# Altium PCB BSPD.PcbDoc (part 1 of 2)
Units mm, origin at the board's own origin, x right, y up, seen from the top; angles counter-clockwise.
Board outline 50 x 50 mm, 2 copper layers (Top Layer, Bottom Layer), stack 1.57 mm thick; 80 components, 29 nets, 173 pads, 66 vias.
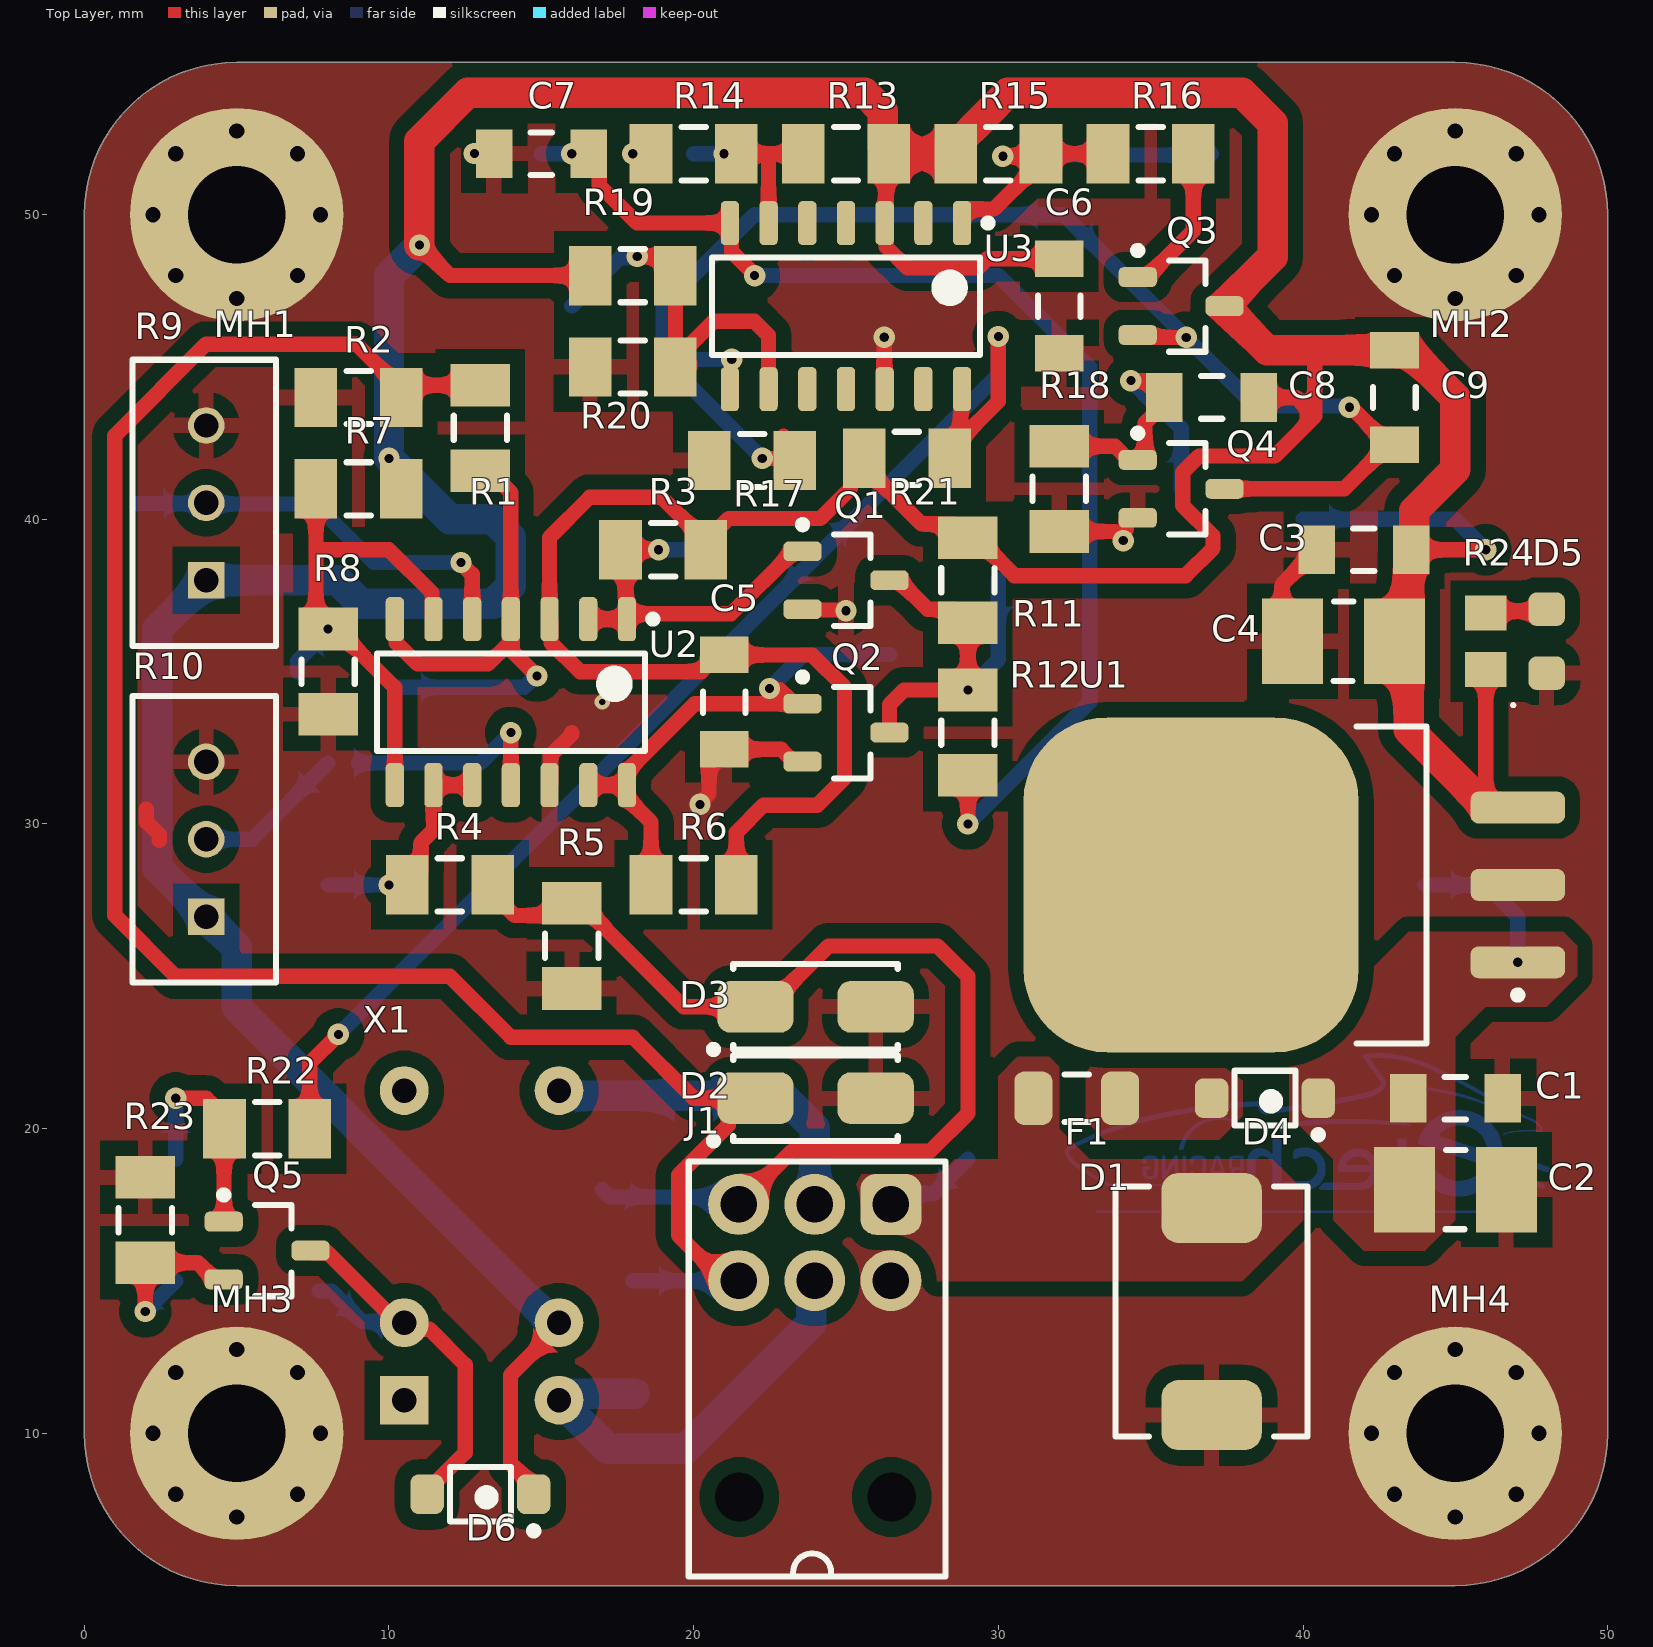
[diagram p0: Top Layer view]
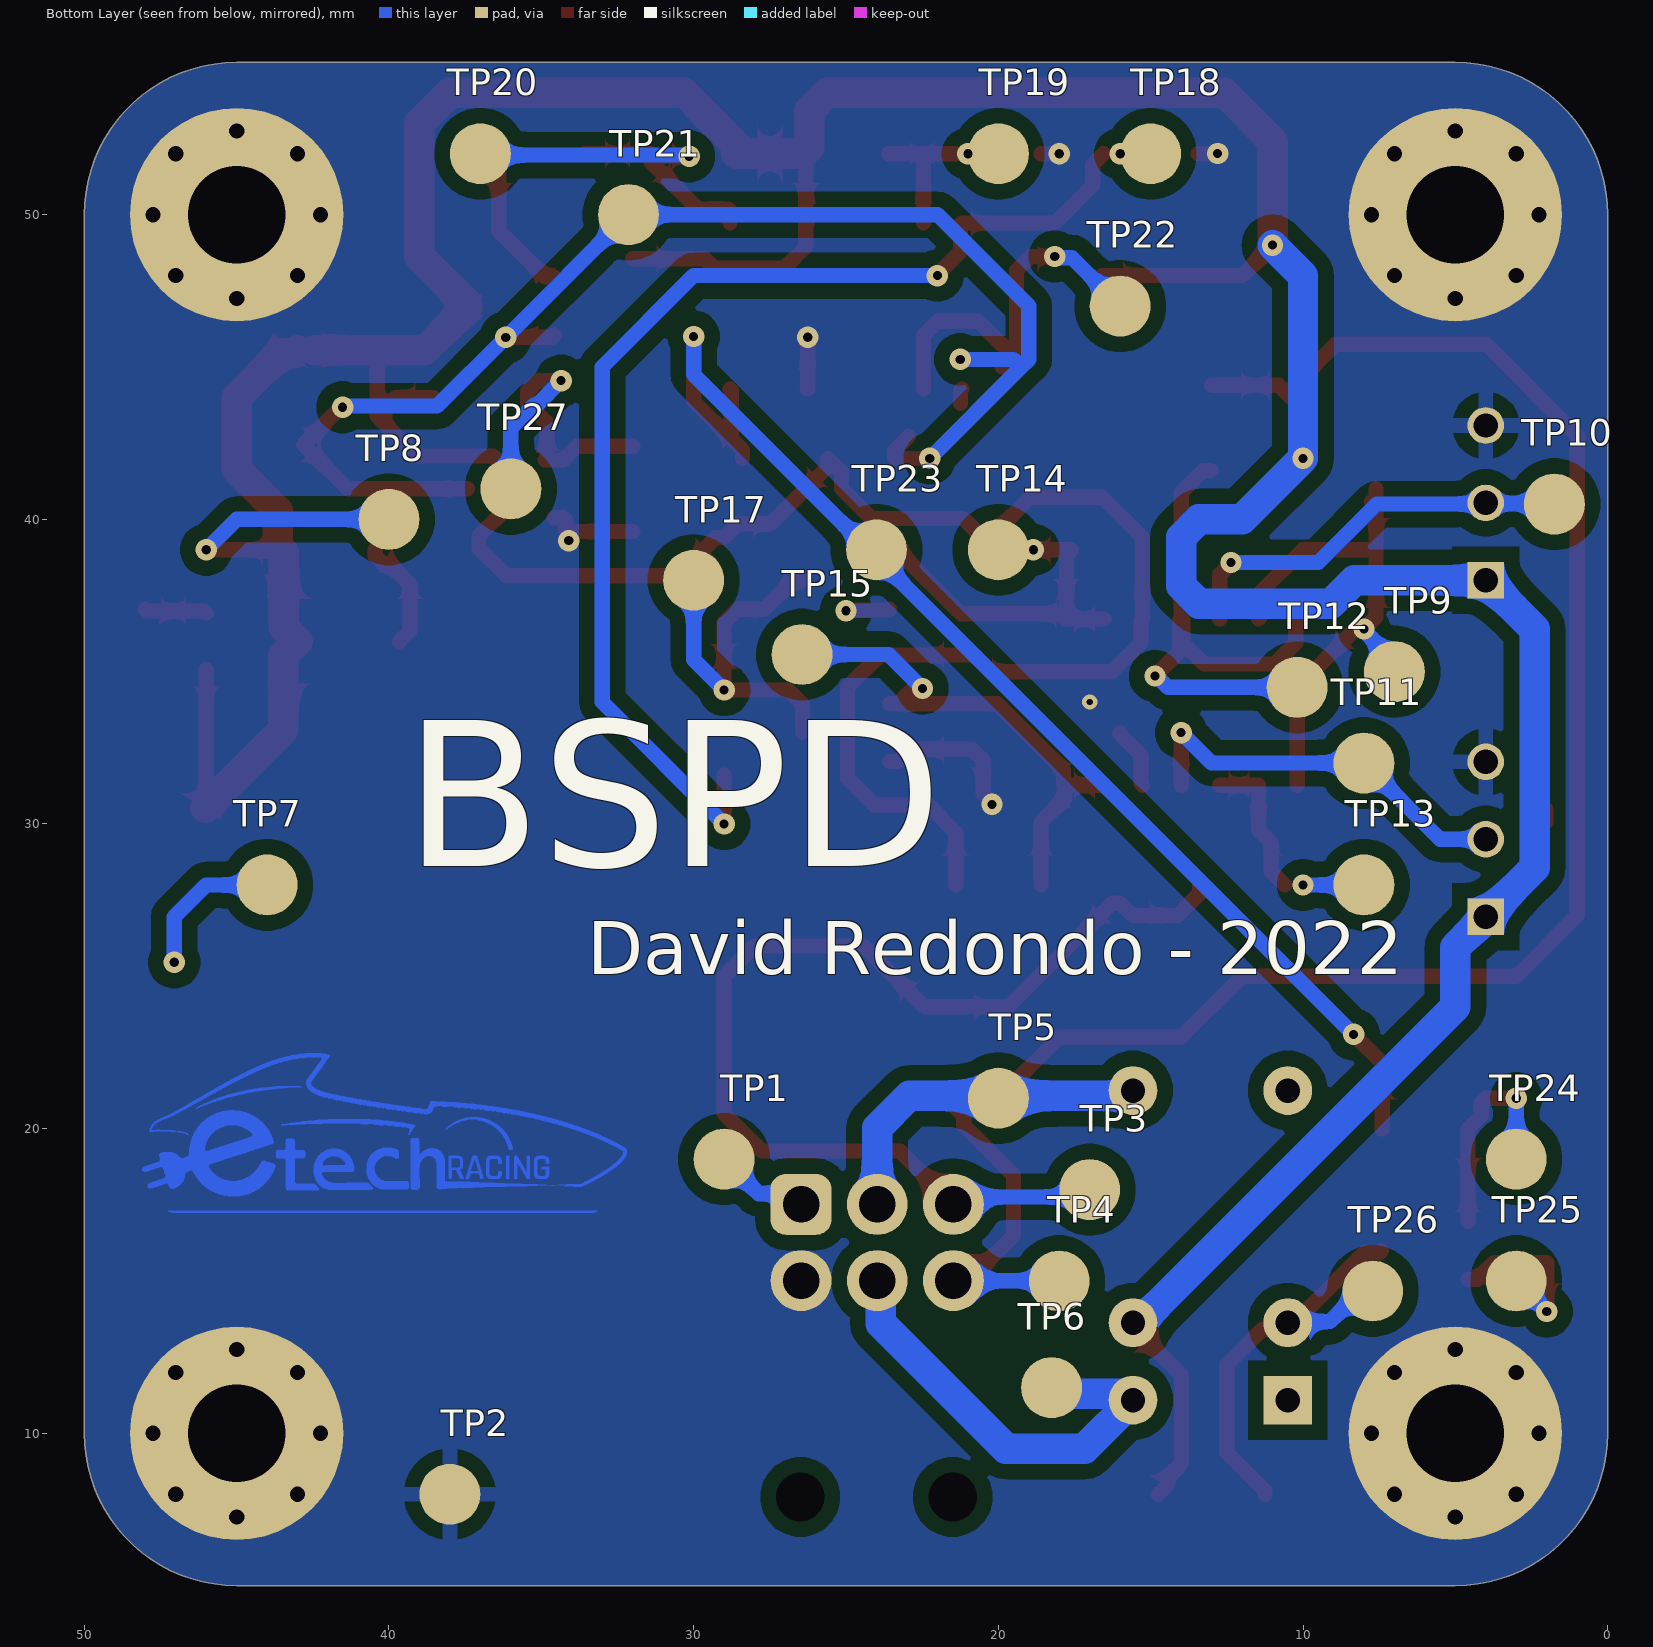
[diagram p1: Bottom Layer view, seen from below]
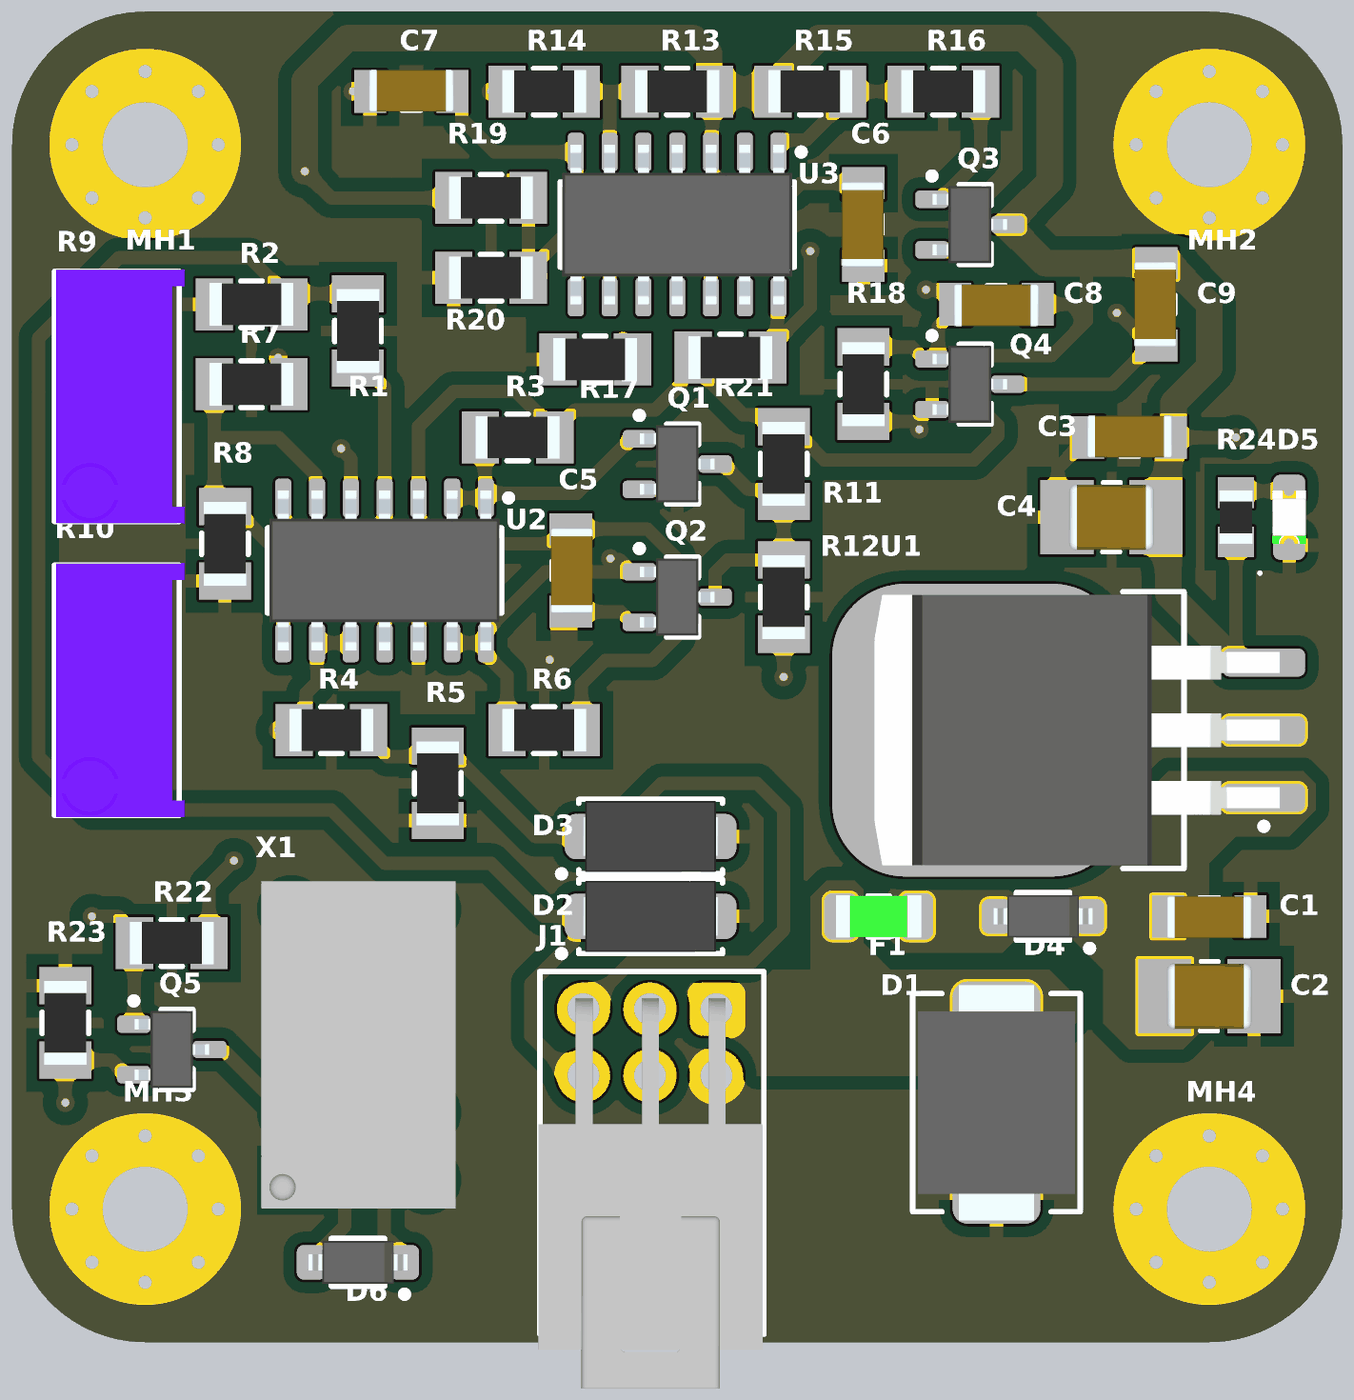
[diagram p2: 3D render of the assembled board from above, using the file's embedded part models]

## Layer stack, top to bottom
Top Solder: solder mask 0.01, Solder Resist, Dk 3.5
Top Layer: signal copper 0.035
Dielectric 1: dielectric 1.5, FR-4, Dk 4.8
Bottom Layer: signal copper 0.035
Bottom Solder: solder mask 0.01, Solder Resist, Dk 3.5

## Board outline
0,10 0,50 cw(c5,50) 5,55 45,55 cw(c45,50) 50,50 50,10 cw(c45,10) 45,5 5,5 cw(c5,10)

## Design rules (kind name [scope] priority, off if disabled: settings)
Clearance [All] p1: gap=0.5 ignorepadtopadclearanceinfootprint=FALSE
HoleSize [All] p1: absolutevalues=TRUE maxlimit=5 minlimit=0.025 maxpercent=80.000 minpercent=20.000
PolygonConnect [All] p1: connectstyle=Relief reliefconductorwidth=0.5 reliefentries=4 polygonreliefangle="90 Angle" airgapwidth=0.5
RoomDefinition BSPD [InComponentClass('BSPD')] p1: confinementstyle=ConfineIn formatcopy=TRUE lockcomponents=FALSE outline 0,66.75 55,66.75 55,0 0,0
RoutingVias [All] p1: holewidth=0.3 width=0.7 viastyle="Through Hole" minholewidth=0.2 minwidth=0.5 maxholewidth=3 maxwidth=5
SilkToSolderMaskClearance [IsPad] p1: minsilkscreentomaskgap=0 clearancetoexposedcopper=TRUE
SolderMaskExpansion [All] p1: expansion=0.102 istentingtop=FALSE
Width [All] p1: maxlimit=5 minlimit=0.2 preferedwidth=0.5
28 further rules are at their usual default settings.

## Components (designator, comment, footprint, x,y, rotation, side; value= is the part's Value field where it differs from the comment)
C1 "885012008055" C1206FNPC-RW 45,21 r180 top
C2 "GRJ32ER71H106KE11L" C10u-50V-1210FNPMLCC-X7R 45,18 r180 top
C3 "885012008055" C1206FNPC-RW 42,39 r0 top
C4 "GRJ32ER71H106KE11L" C10u-50V-1210FNPMLCC-X7R 41.325,36 r0 top
C5 "885012208058" C1206FNPC-RW 21,34 r270 top
C6 "885012208058" C1206FNPC-RW 32,47 r90 top
C7 "885012208018" C1206FNPC-RW 15,52 r0 top
C8 "885012208058" C1206FNPC-RW 37,44 r180 top
C9 "885012208036" C1206FNPC-RW 43,44 r90 top
D1 "824551301" DTVS-DO-214AB 37,14 r90 top
D2 "824501600" DTVS-DO-214AC 24,21 r180 top
D3 "824501600" DTVS-DO-214AC 24,24 r180 top
D4 "MBR0530" DSC-SOD123 38.75,21 r180 top
D5 "150080VS75000" LED_0805_WE 48,36 r90 top
D6 "MBR0530" DSC-SOD123 13,8 r180 top
F1 "0437001.WRA" Fuse_1206 32.575,21 r0 top
J1 "J_NanoFit_2x3" J_NanoFit_2x3 24,11.5 r0 top
MH1 "Mounting_Hole_M3" Mounting_Hole_M3 5,50 r0 top
MH2 "Mounting_Hole_M3" Mounting_Hole_M3 45,50 r0 top
MH3 "Mounting_Hole_M3" Mounting_Hole_M3 5,10 r0 top
MH4 "Mounting_Hole_M3" Mounting_Hole_M3 45,10 r0 top
Q1 "CPH3455-TL-H" TRT-NCH-3/35-CPH 25,38 r0 top
Q2 "CPH3455-TL-H" TRT-NCH-3/35-CPH 25,33 r0 top
Q3 "CPH3455-TL-H" TRT-NCH-3/35-CPH 36,47 r0 top
Q4 "CPH3455-TL-H" TRT-NCH-3/35-CPH 36,41 r0 top
Q5 "CPH3455-TL-H" TRT-NCH-3/35-CPH 6,16 r0 top
R1 "CRCW120610K0FKEA" R1206FTK-W 13,43 r270 top
R2 "CRCW120610K0FKEA" R1206FTK-W 9,44 r0 top
R3 "CRCW120610K0FKEA" R1206FTK-W 19,39 r180 top
R4 "CRCW120610K0FKEA" R1206FTK-W 12,28 r180 top
R5 "CRCW120610K0FKEA" R1206FTK-W 16,26 r90 top
R6 "CRCW120610K0FKEA" R1206FTK-W 20,28 r180 top
R7 "CRCW120610K0FKEA" R1206FTK-W 9,41 r180 top
R8 "CR1206-FX-2201ELF" R1206FTK-W 8,35 r90 top
R9 "3296W-1-103LF" R10k-VTR 4,40.54 r180 top
R10 "3296W-1-103LF" R10k-VTR 4,29.5 r180 top
R11 "CRCW120610K0FKEA" R1206FTK-W 29,38 r270 top
R12 "CRCW120610K0FKEA" R1206FTK-W 29,33 r270 top
R13 "CRS1206-FX-4701ELF" R1206FTK-W 25,52 r0 top
R14 "CRCW120610K0FKEA" R1206FTK-W 20,52 r0 top
R15 "CRCW120610K0FKEA" R1206FTK-W 30,52 r0 top
R16 "CRG1206F100R" R1206FTK-W 35,52 r0 top
R17 "HVC1206-2M0FT3" R1206FTK-W 21.917,41.932 r0 top
R18 "CRCW120610K0FKEA" R1206FTK-W 32,41 r90 top
R19 "CRCW120610K0FKEA" R1206FTK-W 18,48 r180 top
R20 "CRCW120610K0FKEA" R1206FTK-W 18,45 r0 top
R21 "CRCW120610K0FKEA" R1206FTK-W 27,42 r0 top
R22 "CRG1206F100R" R1206FTK-W 6,20 r180 top
R23 "ERJT08J102V" R1206FTK-W 2,17 r90 top
R24 "CR0805-JW-102ELF" R0805FTK 46,36 r270 top
TP1 "TestPoint" TestPoint#1 29,19 r180 bottom
TP2 "TestPoint" TestPoint#1 38,8 r180 bottom
TP3 "TestPoint" TestPoint#1 17,18 r180 bottom
TP4 "TestPoint" TestPoint#1 18,15 r180 bottom
TP5 "TestPoint" TestPoint#1 20,21 r180 bottom
TP6 "TestPoint" TestPoint#2 18.25,11.5 r180 bottom
TP7 "TestPoint" TestPoint#1 44,28 r180 bottom
TP8 "TestPoint" TestPoint#1 40,40 r180 bottom
TP9 "TestPoint" TestPoint#1 7,35 r180 bottom
TP10 "TestPoint" TestPoint#1 1.75,40.5 r90 bottom
TP11 "TestPoint" TestPoint#1 8,32 r90 bottom
TP12 "TestPoint" TestPoint#1 10.19,34.485 r90 bottom
TP13 "TestPoint" TestPoint#1 8,28 r90 bottom
TP14 "TestPoint" TestPoint#1 20,39 r90 bottom
TP15 "TestPoint" TestPoint#1 26.442,35.562 r90 bottom
TP17 "TestPoint" TestPoint#1 30,38 r90 bottom
TP18 "TestPoint" TestPoint#1 15,52 r90 bottom
TP19 "TestPoint" TestPoint#1 20,52 r90 bottom
TP20 "TestPoint" TestPoint#1 37,52 r90 bottom
TP21 "TestPoint" TestPoint#1 32.14,50 r90 bottom
TP22 "TestPoint" TestPoint#1 16,47 r90 bottom
TP23 "TestPoint" TestPoint#1 24,39 r90 bottom
TP24 "TestPoint" TestPoint#1 3,19 r90 bottom
TP25 "TestPoint" TestPoint#1 3,15 r90 bottom
TP26 "TestPoint" TestPoint#1 7.711,14.671 r90 bottom
TP27 "TestPoint" TestPoint#1 36,41 r0 bottom
U1 "LM340S-12/NOPB" LDO_35V-1/12V-TO220 41,28 r180 top
U2 "LM339D" Array_4_Amp_LM339D 14,34 r270 top
U3 "LM339D" Array_4_Amp_LM339D 25,47 r270 top
X1 "G5V-1-DC5" Relay_G5V-1-DC5 13.04,16.17 r90 top

## Footprints (in the part's own frame and the unit in brackets; to place one, negate y for a bottom-side part, rotate by r counter-clockwise, add the part's x,y. Pads: shape width x height; smd on the part's side, far side on the other; paste and mask are expansions set on the pad)
Array_4_Amp_LM339D [mm] "SOIC, 14-Leads, Body 8,65x3,90mm, Pitch 1,27mm, IPC Medium Density"
  rrect50% 1.45x0.6 smd: 1(-2.725,3.81) 2(-2.725,2.54) 3(-2.725,1.27) 4(-2.725,0) 5(-2.725,-1.27) 6(-2.725,-2.54) 7(-2.725,-3.81) 8(2.725,-3.81) 9(2.725,-2.54) 10(2.725,-1.27) 11(2.725,0) 12(2.725,1.27) 13(2.725,2.54) 14(2.725,3.81)
  silkscreen extent -2.85,-4.4 1.6,4.79, body extent -3,-4.33 3,4.33, height 1.75
C10u-50V-1210FNPMLCC-X7R [mm]
  rect 2x2.8 smd: 1(-1.675,0) 2(1.675,0)
  silkscreen extent -0.33,-1.3 0.33,1.3, body extent -1.6,-1.25 1.6,1.25, height 2.78
C1206FNPC-RW [mm] "Chip Capacitor, 2-Leads, Body 3,20x1,60mm, IPC Medium Density"
  rect 1.2x1.6 smd: 1(-1.55,0) 2(1.55,0)
  silkscreen extent -0.35,-0.7 0.35,0.7, body extent -1.59,-0.77 1.61,0.83, height 0.91
DSC-SOD123 [mm] "SOIC, 2-Leads, Body 1,60x2,69mm, Pitch 1,27mm, IPC Low Density"
  rrect50% 1.1x1.3 smd: A(1.75,0) K(-1.75,0)
  silkscreen extent -1.88,-0.9 1,1.32, body extent -1.86,-0.8 1.86,0.8, height 1.36
DTVS-DO-214AB [mm] "Molded Diode, 2-Leads, Body 7,94x5,90mm"
  rrect50% 2.3x3.3 smd: 1(-3.4,0) 2(3.4,0)
  silkscreen extent -4.1,-3.15 4.1,3.15, body extent -4.42,-2.95 4.42,2.95, height 2.9
DTVS-DO-214AC [mm] "Molded Diode, 2-Leads, Body 5,11x2,67mm, IPC Medium Density"
  rrect50% 2.5x1.7 smd: 1(-1.975,0) 2(1.975,0)
  silkscreen extent -2.7,-1.4 3.47,1.52, body extent -2.56,-1.34 2.56,1.34, height 2.5
Fuse_1206 [mm] "Chip Resistor, 2-Leads, Body 3,20x1,58mm, IPC Medium Density"
  rrect50% 1.25x1.75 smd: 1(-1.425,0) 2(1.425,0)
  silkscreen extent -0.4,-0.77 0.4,0.77, body extent -1.6,-0.79 1.6,0.79, height 0.86
J_NanoFit_2x3 [mm]
  rrect50% 2x2 hole 1.2: 1(2.475,6.015)
  round 2 hole 1.2: 2(-0.025,6.015) 3(-2.525,6.015) 4(2.475,3.515) 5(-0.025,3.515) 6(-2.525,3.515)
  round 1.524 hole 1.6: ""(-2.5,-3.59) ""(2.5,-3.59)
  silkscreen extent -4.18,-6.2 4.26,7.42, body extent -4.22,-8.23 4.22,6.43, height 9.35
LDO_35V-1/12V-TO220 [mm] "D2-PAK, 4-Pads, Body 7,55x8,57mm (max), IPC Medium Density"
  rrect50% 3.1x1.05 smd: 1(-6.05,2.54) 2(-6.05,0) 3(-6.05,-2.54)
  rrect50% 11x11 smd: 4(4.675,0)
  silkscreen extent -6.18,-5.2 -0.75,5.2, body extent -6.66,-5.08 8.58,5.08, height 4.54
LED_0805_WE [mm] "SODFL, 2-Leads, Body 1,60x3,20mm, IPC Medium Density"
  rrect50% 1.1x1.2 smd: A(1.05,0) K(-1.05,0)
  silkscreen extent -2.15,1.05 -2.05,1.15, body extent -1,-0.62 1,0.63, height 0.7
Mounting_Hole_M3 [mm]
  round 7 hole 3.2: 1(0,0)
R10k-VTR [mm]
  rect 1.2x1.2 hole 0.8: 1(0,2.54)
  round 1.2 hole 0.8: 2(0,-2.54) 3(0,0)
  silkscreen extent -2.29,-4.7 2.41,4.7, body extent -2.49,-4.78 2.34,4.78, height 11.09
R0805FTK [mm] "Chip Resistor, 2-Leads, Body 2,00x1,25mm, IPC Medium Density"
  rect 1.15x1.35 smd: 1(-0.925,0) 2(0.925,0)
  body extent -1,-0.63 1,0.63, height 0.65
R1206FTK-W [mm] "Chip Resistor, 2-Leads, Body 3,15x1,60mm, IPC Medium Density"
  rect 1.4x1.95 smd: 1(-1.4,0) 2(1.4,0)
  silkscreen extent -0.4,-0.87 0.4,0.87, body extent -1.58,-0.8 1.58,0.8, height 0.61
Relay_G5V-1-DC5 [mm]
  rect 1.6x1.6 hole 0.8: 1(-5.08,2.54)
  round 1.6 hole 0.8: 2(-2.54,2.54) 5(5.08,2.54) 6(5.08,-2.54) 9(-2.54,-2.54) 10(-5.08,-2.54)
  body extent -6.15,-3.62 6.15,3.68, height 10
TestPoint#1 [mm]
  round 2 smd: 1(0,0)
TestPoint#2 [mm]
  round 2 smd: 3(0,0)
TRT-NCH-3/35-CPH [mm] "SOT23, 3-Leads, Body 2,90x2,80mm, Pitch 0,95mm, IPC Low Density"
  rrect50% 1.25x0.65 smd: D(1.425,0) G(-1.425,0.95) S(-1.425,-0.95)
  silkscreen extent -1.55,-1.5 0.8,1.95, body extent -1.4,-1.45 1.4,1.45, height 1.06

## Part data
C1 C3: library part C10n-50V-1206FNPC-C0G/NP0, "Cap Cer 10000PF 50V C0G/NP0 1206", Capacitance=10nF, Case Code (Imperial)=1206, Case Code (Metric)=3216, Manufacturer="Wurth Electronics", Max Operating Temperature=125°C, Min Operating Temperature=-55°C, Supplier Part Number 1=710-885012008055, Tolerance=5%, Voltage Rating=50V, .Creator=DO, Case/Package=1206, Category="Ceramic Capacitors", ComponentLink1Description=https://katalog.we-online.de/pbs/datasheet/885012008055.pdf?src-supplier=Digi-Key, ComponentLink1URL=https://katalog.we-online.de/pbs/datasheet/885012008055.pdf?src-supplier=Digi-Key, ComponentLink2Description="Where buy it", ComponentLink2URL=https://www.we-online.com/catalog/en/WCAP-CSGP-50VDC#885012207092, Length=0.126inch, Manufacturer Part Number=885012008055, Mount="Surface Mount", Packaging="Tape and Reel", Pricing 1="1=0,40000, 10=0,35800, 50=0,35800, 100=0,32100, 1000=0,28400, 10000=0,17200 (USD)", RoHS=Yes, Stock 1=4648, Supplier 1=Mouser, Thickness=0.053inch, Width=0.063inch
C2 C4: library part C10u-50V-1210FNPMLCC-X7R, "Multilayer Ceramic Capacitors MLCC - SMD/SMT 1210 10uF 50volts X7R +/-10% Soft Term", Capacitance=10uF, Case Code (Imperial)=1210, Case Code (Metric)=3225, Manufacturer=Murata, Max Operating Temperature=125°C, Min Operating Temperature=-55°C, Tolerance=10%, Voltage Rating=50V, .Creator=DR, Case/Package=1210, Category="Ceramic Capacitors", ComponentLink1Description=Datasheet, ComponentLink1URL=https://eu.mouser.com/datasheet/2/281/GRJ32ER71H106KE11_01-1977929.pdf, Features="Soft Termination", Length=0.126inch, Manufacturer Part Number=GRJ32ER71H106KE11L, Mount="Surface Mount", Packaging="Tape and Reel", Pricing 1="1000=0,33327, 2000=0,32389, 4000=0,31450, 6000=0,30511, 8000=0,29572 (USD)", RoHS=Yes, RoHS Compliant=Yes, Stock 1=19000, Supplier 1=Avnet, Supplier Part Number 1=GRJ32ER71H106KE11L, Thickness=0.11inch, Width=0.098inch
C5 C6 C8: library part C100n-25V-1206FNPC-X7R, "Cap Cer 0.1UF 25V X7R 1206", Capacitance=100nF, Case Code (Imperial)=1206, Case Code (Metric)=3216, Manufacturer="Wurth Electronics", Max Operating Temperature=125°C, Min Operating Temperature=-55°C, Supplier Part Number 1=732-8109-1-ND, Tolerance=10%, Voltage Rating=25V, .Creator=DO, Case/Package=1206, Category=Capacitor, ComponentLink1Description=Datasheet, ComponentLink1URL=https://www.we-online.com/catalog/datasheet/885012208058.pdf, ComponentLink2Description="Where buy it", ComponentLink2URL=https://www.we-online.com/catalog/en/WCAP-CSGP-25VDC#885012208058, ComponentLink3Description=https://katalog.we-online.de/pbs/datasheet/885012208058.pdf?src-supplier=Digi-Key, ComponentLink3URL=https://katalog.we-online.de/pbs/datasheet/885012208058.pdf?src-supplier=Digi-Key, Length=0.126inch, Manufacturer Part Number=885012208058, Mount="Surface Mount", Packaging="Tape and Reel", Pricing 1="1=0,11000, 10=0,10100, 100=0,09100, 500=0,08000 (USD)", RoHS=Yes, RoHS Compliant=Yes, Stock 1=4375, Supplier 1=Digi-Key, Thickness=0.035inch, Width=0.063inch
C7: library part C10u-10V-1206FNPC-X7R, "Cap, 10ΜF, 10V, 10%, X7R, 1206", Capacitance=10uF, Case Code (Imperial)=1206, Case Code (Metric)=3216, Manufacturer 1="Wurth Electronics", Max Operating Temperature=125°C, Min Operating Temperature=-55°C, Supplier Part Number 1=732-7565-1-ND, Tolerance=10%, Voltage Rating=10V, .Creator=GP, Case/Package=1206, Category="Ceramic Capacitors", ComponentLink1Description=http://www.farnell.com/datasheets/2031895.pdf?src-supplier=Farnell, ComponentLink1URL=http://www.farnell.com/datasheets/2031895.pdf?src-supplier=Farnell, ComponentLink2Description=https://katalog.we-online.de/pbs/datasheet/885012208018.pdf?src-supplier=Digi-Key, ComponentLink2URL=https://katalog.we-online.de/pbs/datasheet/885012208018.pdf?src-supplier=Digi-Key, ComponentLink3Description=http://www.farnell.com/datasheets/2031895.pdf?src-supplier=Newark, ComponentLink3URL=http://www.farnell.com/datasheets/2031895.pdf?src-supplier=Newark, ComponentLink4Description="Wurth Elektronik", ComponentLink4URL=https://www.we-online.com/catalog/en/WCAP-CSGP-10VDC?sq=885012208018#885012208018, Length=0.126inch, Manufacturer Part Number 1=885012208018, Mount="Surface Mount", Packaging="Tape and Reel", Pricing 1="1=0,66000, 10=0,59800, 100=0,53600, 500=0,47400 (USD)", RoHS=Yes, RoHS Compliant=Yes, Stock 1=7, Supplier 1=Digi-Key, Thickness=0.075inch, Width=0.063inch
C9: library part C1u-16V-1206FNPC-X7R, "Cap Cer 1UF 16V X7R 1206", Capacitance=1uF, Case Code (Imperial)=1206, Case Code (Metric)=3216, Manufacturer="Wurth Electronics", Max Operating Temperature=125°C, Min Operating Temperature=-55°C, Supplier Part Number 1=710-885012208036, Tolerance=10%, Voltage Rating=16V, .Creator=GP, Case/Package=1206, Category=Capacitor, ComponentLink1Description=Datasheet, ComponentLink1URL=https://www.we-online.com/catalog/datasheet/885012208036.pdf, ComponentLink2Description="Where buy it", ComponentLink2URL=https://www.we-online.com/catalog/en/WCAP-CSGP-16VDC#885012208036, Length=0.126inch, Manufacturer Part Number=885012208036, Mount="Surface Mount", Packaging="Tape and Reel", Pricing 1="1=0,15000, 10=0,13900, 50=0,13900, 100=0,12400, 500=0,11000, 1000=0,11000, 3000=0,09100, 10000=0,09100 (USD)", RoHS=Yes, RoHS Compliant=Yes, Stock 1=5938, Supplier 1=Mouser, Thickness=0.051inch, Width=0.063inch
D1: library part DTVS-40V-DO-214AB, "TVS diode [Würth Elektronik] 824551301 TVS diode", Clamping Voltage=48.4V, Manufacturer="Wurth Electronics", Max Breakdown Voltage=35.05V, Max Operating Temperature=150°C, Min Operating Temperature=-65°C, Peak Pulse Current=62A, Peak Pulse Power=3kW, Power Line Protection=No, Resistor Type=Zener, Reverse Standoff Voltage=30V, Supplier Part Number 1=9217092P, .Creator=DO, Category="TVS Diodes", ComponentLink1Description=http://www.farnell.com/datasheets/2036459.pdf?src-supplier=Element14, ComponentLink1URL=http://www.farnell.com/datasheets/2036459.pdf?src-supplier=Element14, ComponentLink2Description="Where buy it", ComponentLink2URL=https://www.we-online.com/catalog/en/WE-TVSP?sq=824551301#824551301, Manufacturer Part Number=824551301, Min Breakdown Voltage=35.05V, Mount="Surface Mount", Number of Bidirectional Channels=1, Number of Pins=2, Packaging="Cut Tape", Polarity=Bidirectional, Pricing 1="10=1,72500, 50=1,54700, 100=1,45300, 250=1,35100, 500=1,15000 (USD)", REACH SVHC=Unknown, RoHS=Yes, RoHS Compliant=Yes, Stock 1=1, Supplier 1=RSComponents
D2 D3: library part DTVS-6V-DO-214AC, "TVS diode [Würth Elektronik] 824501600 TVS diode", Clamping Voltage=10.3V, Manufacturer="Wurth Electronics", Max Breakdown Voltage=7.02V, Max Operating Temperature=150°C, Min Operating Temperature=-65°C, Peak Pulse Current=38.8A, Peak Pulse Power=400W, Power Line Protection=No, Resistor Type=Zener, Reverse Standoff Voltage=6V, Supplier Part Number 1=710-824501600, .Creator=DO, Category="TVS Diodes", ComponentLink1Description="Where buy it", ComponentLink1URL=https://www.we-online.com/catalog/en/WE-TVSP?sq=824501600#824501600, ComponentLink2Description=http://www.farnell.com/datasheets/2036401.pdf?src-supplier=Element14, ComponentLink2URL=http://www.farnell.com/datasheets/2036401.pdf?src-supplier=Element14, ComponentLink3Description=https://katalog.we-online.de/pbs/datasheet/824501600.pdf?src-supplier=Digi-Key, ComponentLink3URL=https://katalog.we-online.de/pbs/datasheet/824501600.pdf?src-supplier=Digi-Key, Manufacturer Part Number=824501600, Min Breakdown Voltage=7.02V, Mount="Surface Mount", Number of Bidirectional Channels=1, Number of Pins=2, Packaging="Cut Tape", Polarity=Bidirectional, Pricing 1="1=0,28000, 10=0,26100, 50=0,26100, 100=0,23400, 500=0,20400, 1000=0,17400, 10000=0,17400 (USD)", REACH SVHC=Unknown, RoHS=Yes, RoHS Compliant=Yes, Stock 1=780, Supplier 1=Mouser
D4 D6: library part DSC-0.5/30-SOD123, "VR=30V IF=500mA 30pF P=410mW", Average Rectified Current=500mA, Forward Voltage=430mV, Max Forward Surge Current (Ifsm)=5.5A, Max Repetitive Reverse Voltage (Vrrm)=30V, Max Reverse Current=130uA, Package Quantity=1, Supplier Part Number 1=15R3453, .Creator=GP, Category=Diode, ComponentLink1Description=Datasheet, ComponentLink2Description="Where buy it", ComponentLink3Description=https://datasheet.ciiva.com/30479/0900766b810e2512-30479401.pdf?src-supplier=RSComponents, ComponentLink3URL=https://datasheet.ciiva.com/30479/0900766b810e2512-30479401.pdf?src-supplier=RSComponents, ComponentLink4Description=https://datasheet.ciiva.com/34301/974753-34301826.pdf?src-supplier=Jameco, ComponentLink4URL=https://datasheet.ciiva.com/34301/974753-34301826.pdf?src-supplier=Jameco, ComponentLink5Description=https://datasheet.ciiva.com/910/mbr0530-910516.pdf?src-supplier=Digi-Key, ComponentLink5URL=https://datasheet.ciiva.com/910/mbr0530-910516.pdf?src-supplier=Digi-Key, ComponentLink6Description=https://datasheet.ciiva.com/25931/mbr0530-25931989.pdf?src-supplier=Avnet+Europe, ComponentLink6URL=https://datasheet.ciiva.com/25931/mbr0530-25931989.pdf?src-supplier=Avnet+Europe, ComponentLink7Description=https://datasheet.ciiva.com/8300/mbr0530-8300905.pdf?src-supplier=Avnet, ComponentLink7URL=https://datasheet.ciiva.com/8300/mbr0530-8300905.pdf?src-supplier=Avnet, ComponentLink8Description=https://datasheet.ciiva.com/17318/mbr0530-17318568.pdf?src-supplier=Future+Electronics, ComponentLink8URL=https://datasheet.ciiva.com/17318/mbr0530-17318568.pdf?src-supplier=Future+Electronics, ComponentLink9Description=https://datasheet.ciiva.com/15144/getdatasheetpartid-86760-15144598.pdf?src-supplier=Verical, ComponentLink9URL=https://datasheet.ciiva.com/15144/getdatasheetpartid-86760-15144598.pdf?src-supplier=Verical, ComponentLink10Description=https://datasheet.ciiva.com/910/mbr0530-910518.pdf?src-supplier=Digi-Key, ComponentLink10URL=https://datasheet.ciiva.com/910/mbr0530-910518.pdf?src-supplier=Digi-Key, Contact Plating=Tin,Matte, Current Rating=500mA, Element Configuration=Single, Forward Current=500mA, Height=1.03mm, Lead Free="Lead Free", Length=2.7mm, Max Reverse Leakage Current=130uA, Max Reverse Voltage (DC)=30V, Max Surge Current=5.5A, Mount="Surface Mount", Output Current=500mA, Peak Non-Repetitive Surge Current=5.5A, Polarity=Standard, Pricing 1="1=0,34400, 10=0,23900, 100=0,12200, 500=0,10000 (USD)", Radiation Hardening=No, REACH SVHC="No SVHC", RoHS Compliant=Yes, Series=-, Stock 1=9, Supplier 1=Newark, Voltage Rating (DC)=30V, Weight=0.03g, Width=1.6mm
D5: library part LEDVS-0805-40, "Led, Green, 570 Nm, 2 V, 30 Ma, 40 Mcd Rohs Compliant: Yes", Case Code (Imperial)=0805, Case Code (Metric)=2012, Color=Green, Forward Current=30mA, Forward Voltage=2V, Manufacturer 1="Wurth Electronics", Max Operating Temperature=85°C, Min Operating Temperature=-40°C, Package Quantity=4000, Supplier Part Number 1=8154237, Test Current=20mA, .Creator=DR, Case/Package=0805, Category=LEDs, ComponentLink1Description=Datasheet, ComponentLink1URL=https://www.we-online.com/catalog/datasheet/150080VS75000.pdf, ComponentLink2Description="Where buy it", ComponentLink2URL=https://katalog.we-online.de/en/led/WL-SMCW/150080VS75000, ComponentLink3Description=https://datasheet.ciiva.com/22656/150080vs75000-22656966.pdf?src-supplier=Element14, ComponentLink3URL=https://datasheet.ciiva.com/22656/150080vs75000-22656966.pdf?src-supplier=Element14, ComponentLink4Description=https://datasheet.ciiva.com/29279/759437-da-01-en-chipled-0805-w-kl-h-gruen-150080vs7500-29279047.pdf?src-supplier=Conrad, ComponentLink4URL=https://datasheet.ciiva.com/29279/759437-da-01-en-chipled-0805-w-kl-h-gruen-150080vs7500-29279047.pdf?src-supplier=Conrad, ComponentLink5Description=https://datasheet.ciiva.com/29563/150080vs75000-29563018.pdf?src-supplier=Digi-Key, ComponentLink5URL=https://datasheet.ciiva.com/29563/150080vs75000-29563018.pdf?src-supplier=Digi-Key, Dominant Wavelength=570nm, Height=0.7mm, Length=2mm, Lens Style=Clear,Rectangular, Luminous Intensity=40mcd, Manufacturer Part Number 1=150080VS75000, Mount="Surface Mount", Packaging="Tape and Reel", Pricing 1="50=0,19300, 500=0,12900, 1000=0,12300, 2000=0,11700, 4000=0,11100 (USD)", REACH SVHC=Unknown, RoHS=Yes, Stock 1=850, Supplier 1=RSComponents, Viewing Angle=140°, Wavelength=570nm, Width=1.25mm
F1: library part Fuse_1A_63V_1206, "Fuse Chip Fast Acting 1A 63V SMD Solder Pad 1206 Ceramic T/R Automotive", Case Code (Imperial)=1206, Case Code (Metric)=3216, Current Rating=1A, Manufacturer=Littelfuse, Max Operating Temperature=150°C, Min Operating Temperature=-55°C, Supplier Part Number 1=F10001CT-ND, Voltage Rating (AC)=63V, .Creator=DO, Approvals=CSA,cURus, Case/Package=1206, Category=Fuses, ComponentLink1Description=https://www.littelfuse.com/~/media/electronics/datasheets/fuses/littelfuse_fuse_437a_datasheet.pdf.pdf?src-supplier=Digi-Key, ComponentLink1URL=https://www.littelfuse.com/~/media/electronics/datasheets/fuses/littelfuse_fuse_437a_datasheet.pdf.pdf?src-supplier=Digi-Key, ComponentLink2Description="Where buy it", ComponentLink2URL=https://www.mouser.es/ProductDetail/Littelfuse/0437001WRA?qs=DXv0QSHKF4z9CJhPXjxR%252BA%3D%3D, Fuse Type="Board Mount (Cartridge Style Excluded)", Manufacturer Part Number=0437001.WRA, Mount="Surface Mount", Packaging="Tape and Reel", Pricing 1="1=1,52000, 5=1,47000, 10=1,37600, 50=1,13860, 100=0,94880, 250=0,92508, 500=0,78276, 1000=0,68788 (USD)", RoHS=Yes, Stock 1=5820, Supplier 1=Digi-Key, Voltage Rating (DC)=63V
Q1 Q2 Q3 Q4 Q5: library part TRT-NCH-3/35-CPH, "CPH3455-TL-H N-channel MOSFET Transistor; 3 A; 35 V; 3-Pin CPH", Case/Package=SC, Continuous Drain Current (ID)=3A, Drain to Source Breakdown Voltage=35V, Drain to Source Resistance=108mR, Gate to Source Voltage (Vgs)=20V, Input Capacitance=186pF, Manufacturer="ON Semiconductor", Max Operating Temperature=150°C, Max power dissipation=1W, Min Operating Temperature=-55°C, Package Quantity=3000, Supplier Part Number 1=8009989, .Creator=GP, Category=Transistor, ComponentLink1Description=Datasheet, ComponentLink1URL=https://docs.rs-online.com/5847/0900766b812d514d.pdf, ComponentLink2Description="Where buy it", ComponentLink2URL=https://es.rs-online.com/web/p/mosfet/8009989, ComponentLink3Description=https://datasheet.ciiva.com/947/cph3455-d-947201.pdf?src-supplier=Digi-Key, ComponentLink3URL=https://datasheet.ciiva.com/947/cph3455-d-947201.pdf?src-supplier=Digi-Key, ComponentLink4Description=https://datasheet.ciiva.com/4444/cph3455-d-91653-4444616.pdf?src-supplier=Mouser, ComponentLink4URL=https://datasheet.ciiva.com/4444/cph3455-d-91653-4444616.pdf?src-supplier=Mouser, ComponentLink5Description=https://datasheet.ciiva.com/11164/cph3455-d-11164889.pdf?src-supplier=Avnet, ComponentLink5URL=https://datasheet.ciiva.com/11164/cph3455-d-11164889.pdf?src-supplier=Avnet, Drain to Source Voltage (Vdss)=35V, Element Configuration=Single, Fall Time=5.7ns, Halogen Free="Halogen Free", Height=0.9mm, Lead Free="Lead Free", Length=2.9mm, Manufacturer Part Number=CPH3455-TL-H, Number of Pins=3, Packaging="Tape and Reel", Polarity=N-CHANNEL, Power Dissipation=1W, Pricing 1="50=0,50400 (USD)", Rds On Max=104mR, Rise Time=4.7ns, RoHS=Yes, RoHS Compliant=Yes, Series=-, Stock 1=1, Supplier 1=RSComponents, Turn-Off Delay Time=15ns, Turn-On Delay Time=4.2ns, Width=1.6mm
R1 R3 R4 R6 R11 R14 R15 R19 R20 R21: library part R10k-1206FTK, "Res Thick Film 1206 10K Ohm 1% 0.25W(1/4W) +/-100ppm/ßC Pad SMD Automotive T/R", Case Code (Imperial)=1206, Case Code (Metric)=3216, Package Quantity=10, Package Shape=Rectangular, Resistance=10kR, Resistance Tolerance=1%, Resistor Type="Thick Film", Supplier Part Number 1=70201262, Temperature Coefficient=100ppm/°C, Voltage Rating=200V, .Creator=GP, Case/Package=1206, Category=Resistor, ComponentLink1Description=Datasheet, ComponentLink1URL=https://docs.rs-online.com/bca8/A700000006404581.pdf, ComponentLink2Description="Where buy it", ComponentLink2URL=https://es.rs-online.com/web/p/resistencias-de-montaje-en-superficie/6791765, Construction=Rectangular, Contact Plating=Tin, Depth=1.6mm, Features="Automotive AEC-Q200", Height=0.55mm, Lead Free="Lead Free", Length=3.2mm, Military Standard=Not, Number of Pins=2, Number of Terminations=2, Radiation Hardening=No, REACH SVHC=Unknown, RoHS Compliant=Yes, Series=CRCW, Size Code=1206, Supplier 1="Allied Electronics", Terminal Finish=Tin, Termination=SMD/SMT, Voltage Rating (DC)=200V, Weight=0.000353oz, Width=0.063inch, Working Voltage=200V
R2 R5 R7 R12 R18: library part R51k-1206FTK, "Res Thick Film 1206 51K Ohm 1% 1/4W ±100ppm/°C Molded SMD SMD Punched Carrier T/R", Case Code (Imperial)=1206, Case Code (Metric)=3216, Current Rating=2A, Manufacturer=Panasonic, Manufacturer Part Number=ERJ-S08F5102V, Max Operating Temperature=155°C, Max power dissipation=250mW, Min Operating Temperature=-55°C, Package Quantity=5000, Resistance=51kR, Resistor Type="Thick Film", Supplier Part Number 1=667-ERJ-S08F5102V, Temperature Coefficient=100ppm/°C, Tolerance=1%, Voltage Rating=150V, Voltage Rating (DC)=200V, .Creator=DO, Case/Package=1206, Category=Resistor, ComponentLink1Description=Datasheet, ComponentLink1URL=https://docs.rs-online.com/bca8/A700000006404581.pdf, ComponentLink2Description="Where buy it", ComponentLink2URL=https://es.rs-online.com/web/p/resistencias-de-montaje-en-superficie/6791765, ComponentLink3Description=https://datasheet.ciiva.com/24023/aoa0000ce5-24023518.pdf?src-supplier=Mouser, ComponentLink3URL=https://datasheet.ciiva.com/24023/aoa0000ce5-24023518.pdf?src-supplier=Mouser, ComponentLink4Description=https://datasheet.ciiva.com/9189/aoa0000ce5-9189211.pdf?src-supplier=Avnet, ComponentLink4URL=https://datasheet.ciiva.com/9189/aoa0000ce5-9189211.pdf?src-supplier=Avnet, Construction=Rectangular, Contact Plating=Tin, Depth=1.6mm, Features=Anti-Sulfur, Height=0.028inch, Lead Free="Lead Free", Length=3.2mm, Military Standard=Not, Mount="Surface Mount", Number of Terminations=2, Packaging="Tape and Reel", Power rating=250mW, Pricing 1="1=0,31000, 10=0,26700, 50=0,26700, 100=0,10700, 1000=0,05100, 10000=0,03400 (USD)", RoHS=Yes, RoHS Compliant=Yes, Series=ERJ, Stock 1=4091, Supplier 1=Mouser, Width=0.063inch
R8: library part R2.2K-1206FTK, "Res Thick Film 1206 2.2K Ohm 1% 1/4W ±100ppm/°C Molded SMD SMD Paper Tape on Plastic Reel", Case Code (Imperial)=1206, Case Code (Metric)=3216, Manufacturer 1=Bourns, Max Operating Temperature=155°C, Max power dissipation=250mW, Min Operating Temperature=-55°C, Package Quantity=5000, Resistance=2.2kR, Resistance Tolerance=1%, Resistor Type="Thick Film", Supplier Part Number 1=CR1206-FX-2201ELFCT-ND, Temperature Coefficient=100ppm/°C, Voltage Rating=200V, .Creator=AC, Case/Package=1206, Category="Chip SMD Resistors", ComponentLink1Description=https://datasheet.ciiva.com/11809/0900766b80fcdb72-11809898.pdf?src-supplier=RSComponents, ComponentLink1URL=https://datasheet.ciiva.com/11809/0900766b80fcdb72-11809898.pdf?src-supplier=RSComponents, ComponentLink2Description=https://datasheet.ciiva.com/9123/chpreztr-9123227.pdf?src-supplier=Avnet, ComponentLink2URL=https://datasheet.ciiva.com/9123/chpreztr-9123227.pdf?src-supplier=Avnet, ComponentLink3Description=https://datasheet.ciiva.com/16770/70154685-16770447.pdf?src-supplier=Allied+Electronics, ComponentLink3URL=https://datasheet.ciiva.com/16770/70154685-16770447.pdf?src-supplier=Allied+Electronics, ComponentLink4Description=https://datasheet.ciiva.com/7985/1856384-7985879.pdf?src-supplier=Element14, ComponentLink4URL=https://datasheet.ciiva.com/7985/1856384-7985879.pdf?src-supplier=Element14, ComponentLink5Description=https://datasheet.ciiva.com/22693/1902866-22693258.pdf?src-supplier=Element14, ComponentLink5URL=https://datasheet.ciiva.com/22693/1902866-22693258.pdf?src-supplier=Element14, ComponentLink6Description=RS, ComponentLink6URL=https://es.rs-online.com/web/p/resistencias-fijas-para-montaje-en-superficie/7409097/, Construction=Rectangular, Contact Plating=Tin, Depth=1.6mm, Features="Moisture Resistant", Height=0.6mm, Length=3.2mm, Manufacturer Part Number 1=CR1206-FX-2201ELF, Military Standard=Not, Mount="Surface Mount", Number of Pins=2, Number of Terminations=2, Packaging="Tape and Reel", Power rating=250mW, Pricing 1="1=0,10000, 10=0,04200, 100=0,01700, 1000=0,00762, 2500=0,00661 (USD)", Radiation Hardening=No, REACH SVHC="No SVHC", RoHS=Yes, RoHS Compliant=Yes, Series=CR1206, Stock 1=150, Supplier 1=Digi-Key, Technology="THICK FILM", Termination=SMD/SMT, Thickness=610um, Tolerance=1%, Voltage Rating (DC)=200V, Width=1.6mm
R9 R10: library part R10k-VTR, "Trimmer, Cermet, Rest 10 Kilohms, PCB, 25 Turns, Pwr-Rtg 0.5W, 3296 Series", Color=Blue, Insulation Resistance=1GR, Manufacturer=Bourns, Max Operating Temperature=125°C, Max power dissipation=500mW, Min Operating Temperature=-55°C, Package Quantity=50, Resistance=10kR, Resistance Tolerance=10%, Resistor Type=Cermet, Supplier Part Number 1=1673377, Temperature Coefficient=100ppm/°C, .Creator=DO, Category="Variable Resistors and Potentiometers", ComponentLink1Description=https://datasheet.ciiva.com/19454/853572-19454866.pdf?src-supplier=Jameco, ComponentLink1URL=https://datasheet.ciiva.com/19454/853572-19454866.pdf?src-supplier=Jameco, ComponentLink2Description=https://datasheet.ciiva.com/11830/0900766b8069ccf4-11830871.pdf?src-supplier=RSComponents, ComponentLink2URL=https://datasheet.ciiva.com/11830/0900766b8069ccf4-11830871.pdf?src-supplier=RSComponents, ComponentLink3Description=https://datasheet.ciiva.com/29122/447277-da-01-en-trimmer-tht3296w-1-103lf-10k-0-5w-29122362.pdf?src-supplier=Conrad, ComponentLink3URL=https://datasheet.ciiva.com/29122/447277-da-01-en-trimmer-tht3296w-1-103lf-10k-0-5w-29122362.pdf?src-supplier=Conrad, ComponentLink4Description=https://datasheet.ciiva.com/26913/3296w-1-103lf-26913885.pdf?src-supplier=IIIC, ComponentLink4URL=https://datasheet.ciiva.com/26913/3296w-1-103lf-26913885.pdf?src-supplier=IIIC, ComponentLink5Description=https://datasheet.ciiva.com/1131/1815117-1131273.pdf?src-supplier=Element14, ComponentLink5URL=https://datasheet.ciiva.com/1131/1815117-1131273.pdf?src-supplier=Element14, ComponentLink6Description=https://datasheet.ciiva.com/18411/70153578-18411561.pdf?src-supplier=Allied+Electronics, ComponentLink6URL=https://datasheet.ciiva.com/18411/70153578-18411561.pdf?src-supplier=Allied+Electronics, ComponentLink7Description=https://datasheet.ciiva.com/3266/3296-3266187.pdf?src-supplier=Avnet, ComponentLink7URL=https://datasheet.ciiva.com/3266/3296-3266187.pdf?src-supplier=Avnet, ComponentLink8Description=https://datasheet.ciiva.com/30093/3296-30093899.pdf?src-supplier=Onlinecomponents.com, ComponentLink8URL=https://datasheet.ciiva.com/30093/3296-30093899.pdf?src-supplier=Onlinecomponents.com, ComponentLink9Description=https://datasheet.ciiva.com/2156/3296-2156893.pdf?src-supplier=Digi-Key, ComponentLink9URL=https://datasheet.ciiva.com/2156/3296-2156893.pdf?src-supplier=Digi-Key, ComponentLink10Description=https://datasheet.ciiva.com/14173/ew3296-dat-e-14173022.pdf?src-supplier=Distrelec, ComponentLink10URL=https://datasheet.ciiva.com/14173/ew3296-dat-e-14173022.pdf?src-supplier=Distrelec, ComponentLink11Description="Where buy it", ComponentLink11URL=https://es.rs-online.com/web/p/potenciometros-de-ajuste/5219647, Contact Plating=Tin,Matte, Depth=4.83mm, Height=0.395inch, Lead Free="Lead Free", Length=9.53mm, Manufacturer Part Number=3296W-1-103LF, Military Standard=Not, Mount="PCB,Through Hole", Number of Turns=25, Packaging=Rail/Tube, Power rating=500mW, Pricing 1="50=2,54800, 100=2,31900, 200=2,14000, 300=1,88400, 500=1,55300 (USD)", Radiation Hardening=No, REACH SVHC="No SVHC", RoHS=Yes, RoHS Compliant=Yes, Series=3296, Stock 1=3300, Supplier 1=RSComponents, Taper=Linear, Technology=CERMET, Termination=Pin, Tolerance=10%, Weight=0.03oz, Width=9.53mm
R13: library part R4.7K-1206FTK, "Res Thick Film 1206 4.7K Ohm 1% 1/2W ±100ppm/°C Molded SMD T/R", Case Code (Imperial)=1206, Case Code (Metric)=3016, Manufacturer 1="Bourns JW Miller", Max Operating Temperature=155°C, Max power dissipation=500mW, Min Operating Temperature=-55°C, Resistance=4.7kR, Resistor Type="Thick Film", Supplier Part Number 1=CRS1206-FX-4701ELFCT-ND, Temperature Coefficient=100ppm/°C, Tolerance=1%, Voltage Rating=400V, .Creator=AC, Case/Package=1206, Category="Chip SMD Resistors", ComponentLink1Description=https://datasheet.ciiva.com/48986/70483705-48986735.pdf?src-supplier=Allied+Electronics, ComponentLink1URL=https://datasheet.ciiva.com/48986/70483705-48986735.pdf?src-supplier=Allied+Electronics, ComponentLink3Description=RS, ComponentLink3URL=https://es.rs-online.com/web/p/resistencias-de-montaje-en-superficie/8672965, Height=0.026inch, Length=0.122inch, Manufacturer Part Number 1=CRS1206-FX-4701ELF, Mount="Surface Mount", Number of Terminations=2, Packaging="Cut Tape", Power rating=500mW, Pricing 1="1=0,42000, 10=0,35400, 100=0,13850, 1000=0,05796, 2500=0,05313 (USD)", REACH SVHC="No SVHC", RoHS=Yes, Supplier 1=Digi-Key, Termination=SMD/SMT, Voltage Rating (DC)=400V, Width=0.063inch, Working Voltage=400V
R16 R22: library part R100-1206FTK, "Res Thick Film 1206 100 Ohm 1% 0.25W(1/4W) ±200ppm/C Pad SMD T/R", Case Code (Imperial)=1206, Case Code (Metric)=3216, Manufacturer="TE Connectivity", Max Operating Temperature=125°C, Max power dissipation=250mW, Min Operating Temperature=-55°C, Number of Resistors=1, Package Quantity=5000, Resistance=100R, Resistor Type="Thick Film", Supplier Part Number 1=A106068CT-ND, Temperature Coefficient=200ppm/°C, Tolerance=1%, Voltage Rating=200V, .Creator=AC, Case/Package=1206, Category=Resistor, ComponentLink1Description=Datasheet, ComponentLink1URL=https://docs.rs-online.com/7aab/0900766b815b7339.pdf, ComponentLink2Description="Where buy it", ComponentLink2URL=https://es.rs-online.com/web/p/resistencias-de-montaje-en-superficie/2232120, ComponentLink3Description=https://datasheet.ciiva.com/11808/0900766b800a696e-11808648.pdf?src-supplier=RSComponents, ComponentLink3URL=https://datasheet.ciiva.com/11808/0900766b800a696e-11808648.pdf?src-supplier=RSComponents, ComponentLink4Description=https://datasheet.ciiva.com/16763/70063020-16763547.pdf?src-supplier=Allied+Electronics, ComponentLink4URL=https://datasheet.ciiva.com/16763/70063020-16763547.pdf?src-supplier=Allied+Electronics, ComponentLink5Description=https://datasheet.ciiva.com/5562/eng-ds-1773204-g-5562604.pdf?src-supplier=Mouser, ComponentLink5URL=https://datasheet.ciiva.com/5562/eng-ds-1773204-g-5562604.pdf?src-supplier=Mouser, Depth=1.55mm, ELV=Compliant, Height=0.55mm, Length=3.1mm, Manufacturer Part Number=CRG1206F100R, Mount="Surface Mount", Number of Terminations=2, Packaging="Tape and Reel", Power rating=250mW, Pricing 1="1=0,10000, 10=0,07600, 100=0,02920, 1000=0,01285, 2500=0,01110 (USD)", Radiation Hardening=No, RoHS=Yes, RoHS Compliant=Yes, Series="CRG, Neohm", Stock 1=13476, Supplier 1=Digi-Key, Technology="THICK FILM", Termination=Solder, Weight=0.000571oz, Width=1.55mm
R17: library part R2M-1206FTK, "Res Thick Film 1206 2M Ohm 1% 0.3W ±100ppm/C Pad SMD T/R", Case Code (Imperial)=1206, Case Code (Metric)=3216, Manufacturer="TT Welwyn", Power rating=300mW, Resistance=2MR, Resistor Type="Thick Film", Supplier Part Number 1=6119491, Temperature Coefficient=100ppm/°C, Tolerance=1%, Voltage Rating=1kV, .Creator=DO, Category=Uncategorized, ComponentLink1Description=Datasheet, ComponentLink1URL=https://www.murata.com/en-eu/api/pdfdownloadapi?cate=cgsubHighVoltageResistors&partno=MHR0307SA205G20, ComponentLink2Description=https://datasheet.ciiva.com/28677/1720556-28677405.pdf?src-supplier=Element14, ComponentLink2URL=https://datasheet.ciiva.com/28677/1720556-28677405.pdf?src-supplier=Element14, Manufacturer Part Number=HVC1206-2M0FT3, Packaging="Cut Tape", Pricing 1="3000=1,11000 (USD)", REACH SVHC="No SVHC", Resistence=2MR, RoHS=Yes, RoHS Compliant=Yes, Supplier 1="Future Electronics", Voltage Rating (DC)=1kV
R23: library part R1k-1206FTK, "Res Thick Film 1206 1K Ohm 5% 0.33W(1/3W) ±200ppm/C Pad SMD Automotive T/R", Case Code (Imperial)=1206, Case Code (Metric)=3216, Manufacturer=Panasonic, Max Operating Temperature=155°C, Max power dissipation=333mW, Min Operating Temperature=-55°C, Package Quantity=5000, Power rating=330mW, Resistance=1kR, Resistor Type="Thick Film", Supplier Part Number 1=7218936, Temperature Coefficient=200ppm/°C, Tolerance=5%, Voltage Rating=200V, .Creator=GP, Case/Package=1206, Category=Resistor, ComponentLink1Description=Datasheet, ComponentLink1URL=https://docs.rs-online.com/ef78/0900766b812cb812.pdf, ComponentLink2Description="Where buy it", ComponentLink2URL=https://es.rs-online.com/web/p/resistencias-de-montaje-en-superficie/7218936, Contact Plating=Tin, Depth=1.6mm, Features="Automotive AEC-Q200", Height=0.6mm, Length=3.2mm, Manufacturer Part Number=ERJT08J102V, Military Standard=Not, Mount="Surface Mount", Number of Pins=2, Number of Terminations=2, Packaging="Tape and Reel", Pricing 1="5=0,32200, 50=0,30000, 100=0,28100, 250=0,25900, 500=0,23800 (USD)", Radiation Hardening=No, REACH SVHC="No SVHC", RoHS=Yes, RoHS Compliant=Yes, Stock 1=1, Supplier 1=RSComponents, Termination=Tab, Voltage Rating (DC)=200V, Width=0.063inch
R24: library part R1k-0805FTK, "Res Thick Film 0805 1K Ohm 5% 1/8W ±200ppm/°C Molded SMD SMD Paper Tape on Plastic Reel", Case Code (Imperial)=0805, Case Code (Metric)=2012, Manufacturer 1=Bourns, Max Operating Temperature=155°C, Max power dissipation=125mW, Min Operating Temperature=-55°C, Package Quantity=1, Resistance=1kR, Resistor Type="Thick Film", Temperature Coefficient=200ppm/°C, Tolerance=5%, Voltage Rating=150V, .Creator=GP, Case/Package=0805, Category="Chip SMD Resistors", ComponentLink1Description=https://datasheet.ciiva.com/11821/0900766b80fcdb72-11821134.pdf?src-supplier=RSComponents, ComponentLink1URL=https://datasheet.ciiva.com/11821/0900766b80fcdb72-11821134.pdf?src-supplier=RSComponents, ComponentLink2Description=https://datasheet.ciiva.com/15225/getdatasheetpartid-78155-15225381.pdf?src-supplier=Verical, ComponentLink2URL=https://datasheet.ciiva.com/15225/getdatasheetpartid-78155-15225381.pdf?src-supplier=Verical, ComponentLink3Description=https://datasheet.ciiva.com/22693/1902866-22693253.pdf?src-supplier=Element14, ComponentLink3URL=https://datasheet.ciiva.com/22693/1902866-22693253.pdf?src-supplier=Element14, ComponentLink4Description=https://datasheet.ciiva.com/7986/1856384-7986184.pdf?src-supplier=Element14, ComponentLink4URL=https://datasheet.ciiva.com/7986/1856384-7986184.pdf?src-supplier=Element14, ComponentLink5Description=https://datasheet.ciiva.com/7985/1856384-7985867.pdf?src-supplier=Element14, ComponentLink5URL=https://datasheet.ciiva.com/7985/1856384-7985867.pdf?src-supplier=Element14, ComponentLink6Description=https://datasheet.ciiva.com/30242/159chpreztr-30242765.pdf?src-supplier=Onlinecomponents.com, ComponentLink6URL=https://datasheet.ciiva.com/30242/159chpreztr-30242765.pdf?src-supplier=Onlinecomponents.com, ComponentLink7Description=https://datasheet.ciiva.com/6547/chpreztr-6547359.pdf?src-supplier=Digi-Key, ComponentLink7URL=https://datasheet.ciiva.com/6547/chpreztr-6547359.pdf?src-supplier=Digi-Key, Contact Plating=Tin, Depth=1.25mm, Features="Moisture Resistant", Height=0.5mm, Lead Free="Lead Free", Length=2mm, Manufacturer Part Number 1=CR0805-JW-102ELF, Military Standard=Not, Mount="Surface Mount", Number of Pins=2, Number of Terminations=2, Packaging="Tape and Reel", Power rating=125mW, Pricing 1="1=0,05930, 10=0,03510, 25=0,01790, 100=0,00800, 250=0,00790, 500=0,00590, 1000=0,00360, 3000=0,00350, 6000=0,00250 (USD)", Radiation Hardening=No, REACH SVHC="No SVHC", RoHS=Yes, Stock 1=27510, Supplier 1="Arrow Electronics", Supplier Part Number 1=CR0805-JW-102ELF, Termination=SMD/SMT, Thickness=508um, Voltage Rating (DC)=150V, Width=1.25mm
TP1 TP2 TP3 TP4 TP5 TP6 TP7 TP8 TP9 TP10 TP11 TP12 TP13 TP14 TP15 TP17 TP18 TP19 TP20 TP21 TP22 TP23 TP24 TP25 TP26 TP27: "Test Point 1x1 mm", .Creator=GP, .PCBcheck=GP, .SCHcheck=GP, Category=TestPoint
U1: library part LDO_35V-1/12V-TO220, "1.5-A, 35-V, linear voltage regulator 3-TO-220 -40 to 125", Case/Package=TO-220, Dropout Voltage=2V, Manufacturer="Texas Instruments", Max Input Voltage=35V, Max Operating Temperature=125°C, Max Output Current=1A, Min Operating Temperature=-40°C, Output Voltage=12V, Output Voltage Accuracy=2%, Package Quantity=45, Quiescent Current=8mA, Supplier Part Number 1=296-50628-ND, .Creator=AC, Accuracy=2%, Category="Voltage Regulators - Linear", ComponentLink1Description=https://datasheet.ciiva.com/16490/lm340-n-16490133.pdf?src-supplier=Avnet+Asia, ComponentLink1URL=https://datasheet.ciiva.com/16490/lm340-n-16490133.pdf?src-supplier=Avnet+Asia, ComponentLink2Description="Where buy it", ComponentLink2URL=https://es.rs-online.com/web/p/reguladores-de-tension/1977323, Height=8.89mm, Lead Free="Lead Free", Length=10.16mm, Manufacturer Part Number=LM340S-12/NOPB, Mount="Through Hole", Number of Outputs=1, Number of Pins=3, Output Current=1A, Output Type=Fixed, Packaging=Rail/Tube, Polarity=Positive, Pricing 1="1=1,97000, 10=1,76700, 25=1,66680, 100=1,42020, 250=1,33348, 500=1,16680, 1000=1,10075 (USD)", Radiation Hardening=No, RoHS=Yes, RoHS Compliant=Yes, Series=LM340-N, Supplier 1=Digi-Key, Voltage=12V, Width=4.7mm
U2 U3: library part Array_4_Comp_LM339D, "Comparator Quad ±18V/36V 14-Pin SOIC Tube", Case/Package=SOIC, Dual Supply Voltage=9V, Input Bias Current=250nA, Input Offset Voltage (Vos)=5mV, Manufacturer="Texas Instruments", Max Dual Supply Voltage=15V, Max Operating Temperature=70°C, Max Supply Current=500uA, Max Supply Voltage=30V, Min Dual Supply Voltage=1V, Min Operating Temperature=0°C, Min Supply Voltage=2V, Nominal Supply Current=2mA, Output Current=20mA, Output Current per Channel=6mA, Package Quantity=50, Quiescent Current=2.5mA, Supplier Part Number 1=296-1013-5-ND, Voltage Gain=106.02dB, .Creator=DO, Category="Amplifiers - Op Amps, Buffer, Instrumentation", ComponentLink1Description=https://datasheet.ciiva.com/15131/getdatasheetpartid-248452-15131099.pdf?src-supplier=Verical, ComponentLink1URL=https://datasheet.ciiva.com/15131/getdatasheetpartid-248452-15131099.pdf?src-supplier=Verical, ComponentLink2Description=https://datasheet.ciiva.com/1483/1831045-1483000.pdf?src-supplier=Element14, ComponentLink2URL=https://datasheet.ciiva.com/1483/1831045-1483000.pdf?src-supplier=Element14, ComponentLink3Description=https://datasheet.ciiva.com/1827/lm139a-1827534.pdf?src-supplier=Digi-Key, ComponentLink3URL=https://datasheet.ciiva.com/1827/lm139a-1827534.pdf?src-supplier=Digi-Key, ComponentLink4Description=https://datasheet.ciiva.com/2970/lm2901-2970484.pdf?src-supplier=Avnet, ComponentLink4URL=https://datasheet.ciiva.com/2970/lm2901-2970484.pdf?src-supplier=Avnet, ComponentLink5Description=https://datasheet.ciiva.com/48712/001010753-da-01-en-ic-quad-diff-comp-lm339d-soic-14-tid-48712470.pdf?src-supplier=Conrad, ComponentLink5URL=https://datasheet.ciiva.com/48712/001010753-da-01-en-ic-quad-diff-comp-lm339d-soic-14-tid-48712470.pdf?src-supplier=Conrad, ComponentLink6Description="Where buy it", ComponentLink6URL=https://es.rs-online.com/web/p/comparadores/0858411, Contact Plating=Gold, Height=1.58mm, Lead Free="Lead Free", Length=8.65mm, Manufacturer Part Number=LM339D, Max Input Current=250nA, Mount="Surface Mount", Number of Channels=4, Number of Elements=4, Number of Pins=14, Output Type=TTL, Packaging=Rail/Tube, Pricing 1="1=0,93000, 10=0,83500, 25=0,79240, 100=0,65090, 250=0,60848, 500=0,53774, 1000=0,46725 (USD)", Radiation Hardening=No, REACH SVHC="No SVHC", Response Time=0.3us, RoHS=Yes, RoHS Compliant=Yes, Series=LM339, Stock 1=10834, Supplier 1=Digi-Key, Supply Current=2mA, Technology=BIPOLAR, Weight=0.004318oz, Width=3.91mm
X1: library part Relay_G5V-1-DC5, "Electromechanical Relay SPDT 1A 5VDC 167Ohm Through Hole", Case/Package=DIP, Coil Current=30mA, Coil Power=150mW, Coil Resistance=167R, Coil Voltage (DC)=5V, Contact Current Rating=1A, Insulation Resistance=1GR, Manufacturer=Omron, Max Operating Temperature=70°C, Max Voltage Rating (AC)=125V, Max Voltage Rating (DC)=60V, Min Operating Temperature=-40°C, Package Quantity=25, .Creator=DO, Approvals=UL,CSA, Category="Signal Relays", Coil Type=Non-Latching, ComponentLink1Description=https://datasheet.ciiva.com/1525/96550-1525281.pdf?src-supplier=Element14, ComponentLink1URL=https://datasheet.ciiva.com/1525/96550-1525281.pdf?src-supplier=Element14, ComponentLink2Description=https://datasheet.ciiva.com/19455/187240-19455238.pdf?src-supplier=Jameco, ComponentLink2URL=https://datasheet.ciiva.com/19455/187240-19455238.pdf?src-supplier=Jameco, ComponentLink3Description=https://datasheet.ciiva.com/26921/getdatasheetpartid-765626-26921061.pdf?src-supplier=Verical, ComponentLink3URL=https://datasheet.ciiva.com/26921/getdatasheetpartid-765626-26921061.pdf?src-supplier=Verical, ComponentLink4Description=https://datasheet.ciiva.com/18421/70175634-18421511.pdf?src-supplier=Allied+Electronics, ComponentLink4URL=https://datasheet.ciiva.com/18421/70175634-18421511.pdf?src-supplier=Allied+Electronics, ComponentLink5Description=https://datasheet.ciiva.com/15718/g5v-1-15718184.pdf?src-supplier=Onlinecomponents.com, ComponentLink5URL=https://datasheet.ciiva.com/15718/g5v-1-15718184.pdf?src-supplier=Onlinecomponents.com, ComponentLink6Description=https://datasheet.ciiva.com/2416/g5v-1-0911-2416495.pdf?src-supplier=Digi-Key, ComponentLink6URL=https://datasheet.ciiva.com/2416/g5v-1-0911-2416495.pdf?src-supplier=Digi-Key, ComponentLink7Description=https://datasheet.ciiva.com/30083/en-g5v-1-30083503.pdf?src-supplier=Onlinecomponents.com, ComponentLink7URL=https://datasheet.ciiva.com/30083/en-g5v-1-30083503.pdf?src-supplier=Onlinecomponents.com, ComponentLink8Description="Where buy it", ComponentLink8URL=https://es.rs-online.com/web/p/reles-sin-enclavamiento/8411420/?relevancy-data=7365617263685F636173636164655F6F726465723D31267365617263685F696E746572666163655F6E616D653D4931384E53656172636847656E65726963267365617263685F6C616E67756167655F757365643D6573267365617263685F6D617463685F6D6F64653D6D61746368616C6C7061727469616C267365617263685F7061747465726E5F6D6174636865643D5E5B5C707B4C7D5C707B4E647D2D2C2F255C2E5D2B24267365617263685F7061747465726E5F6F726465723D313333267365617263685F73745F6E6F726D616C697365643D59267365617263685F726573706F6E73655F616374696F6E3D267365617263685F747970653D4B4559574F52445F53494E474C455F414C5048415F4E554D45524943267365617263685F7370656C6C5F636F72726563745F6170706C6965643D59267365617263685F77696C645F63617264696E675F6D6F64653D4E4F4E45267365617263685F6B6579776F72643D4735562D312D444335267365617263685F6B6579776F72645F6170703D4735562D312D444335267365617263685F636F6E6669673D3126&searchHistory=%7B%22enabled%22%3Atrue%7D, Contact Material=Gold,Silver, Current Rating=1A, Depth=7.5mm, Height=10mm, Lead Free="Lead Free", Length=12.5mm, Manufacturer Part Number=G5V-1-DC5, Max Current Rating=1A, Mount="Through Hole,PCB", Number of Pins=6, Number of Poles=1, Operate Time=5ms, Packaging=Bulk, Power Consumption=150mW, Pricing 1="1=1,32941, 10=1,30681, 30=1,28421, 50=1,25430, 100=1,24300 (USD)", Radiation Hardening=No, REACH SVHC=Unknown, Relay Type="General Purpose", Release Time=5ms, RoHS=Yes, Stock 1=10, Supplier 1=Avnet, Supplier Part Number 1=G5V-1-DC5, Termination="PC Pin", Throw Configuration=SPDT, Type=Electromechanical, Voltage Rating (AC)=125V, Voltage Rating (DC)=60V, Width=7.5mm

## Via types
v1: diameter 0.7, hole 0.3, Top Layer to Bottom Layer, tented both sides, 33 vias
v2: diameter 0.7, hole 0.5, Top Layer to Bottom Layer, tented both sides, 32 vias
v3: diameter 0.5, hole 0.2, Top Layer to Bottom Layer, tented both sides, 1 vias

## Nets (pads, with @x,y where several pads share a name; then routed paths per layer and width w, separated by ;. In a path a pad name is that pad's centre, name@x,y a point inside that pad or via, vN(x,y) a via of type N, cw(c..) or ccw(c..) an arc to the next point about the centre after c; other vN are vias at no path point)
+12: C3.2 C4.2 C5.1 C6.2 C8.1 C9.2 D6.K Q3.D R3.1 R6.1 R7.1 R9.1 R10.1 R11.1 R13.2 R15.1 R19.2 R21.1 R24.2 TP8.1 U1.3 U2.3 U3.3 X1.9 | length 220.1